# EAGLE board STorM32 BGC mpu module v008 (EAGLE 6.5.0)
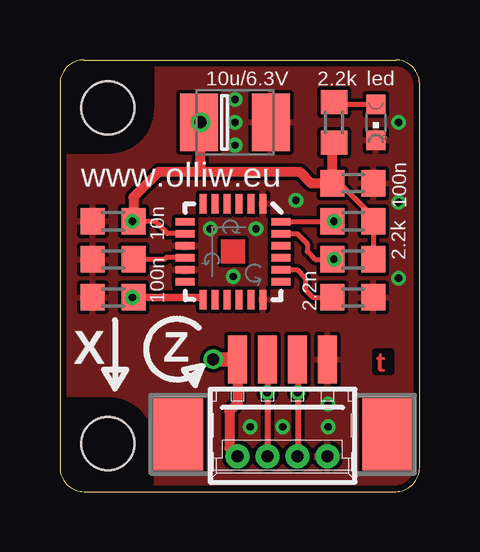
[diagram p0: board, top side]
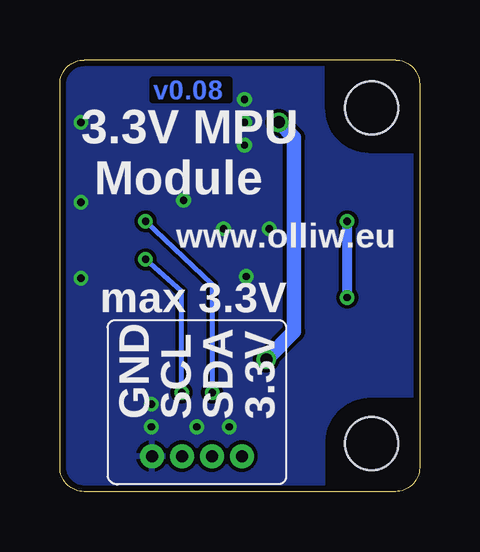
[diagram p1: board, bottom side, seen from below]

Size 15 x 18 mm. Coordinates in mm from the lower left corner, seen from the top.
Outline: 1,18 14,18 arc-90 15,17 15,1 arc-90 14,0 1,0 arc-90 0,1 0,17 arc-90 1,18
Copper layers (1*16): Top 0.035mm / dielectric 1.5mm / Bottom 0.035mm
Design rules "Fusion_eagle_rule_v1.1-shapes-supply-changed": minimum track width 6mil, minimum drill 12mil, track to track 6mil, track to pad 6mil, pad to pad 6mil, via to via 6mil, smd to smd 0mil, copper to edge 10mil, drill to drill 10mil, minimum pad ring 10mil, minimum via ring 6mil, stop-mask expansion 2mil, vias tented up to drill 100mil, thermal gap 6mil
Holes 2.2 mm at 2,2 2,16

## Footprints (pad centres in the part's own frame; a part is rotated, then mirrored left to right if it is on the bottom)
SMC_B = smd 1.6 x 2.4: + -1.5,0; - 1.5,0
C0603 = smd 1 x 1.1: 1 -0.85,0; 2 0.85,0
QFN-24 = smd 0.8 x 0.3: 1 -2,1.25; 2 -2,0.75; 3 -2,0.25; 4 -2,-0.25; 5 -2,-0.75; 6 -2,-1.25; 13 2,-1.25; 14 2,-0.75; 15 2,-0.25; 16 2,0.25; 17 2,0.75; 18 2,1.25 | smd 0.3 x 0.8: 7 -1.25,-2; 8 -0.75,-2; 9 -0.25,-2; 10 0.25,-2; 11 0.75,-2; 12 1.25,-2; 19 1.25,2; 20 0.75,2; 21 0.25,2; 22 -0.25,2; 23 -0.75,2; 24 -1.25,2
MOLEX-53261-04-SMD-BOTH = smd 0.8 x 2: 1 1.875,-2.5; 2 0.625,-2.5; 3 -0.625,-2.5; 4 -1.875,-2.5 | drill 0.5 pad 0.698: 5 1.875,1.545; 6 0.625,1.545; 7 -0.625,1.545; 8 -1.875,1.545 | smd 2.1 x 3: S1 4.375,0.625; S2 -4.375,0.625
CHIPLED_0603 = smd 0.8 x 0.8: A 0,-0.75; C 0,0.75
R0603 = smd 1 x 1.1: 1 -0.85,0; 2 0.85,0

## Placement (x,y rotation side)
C1  10u/6.3V  [SMC_B]  7.3,15.4 0 top
C2  100n  [C0603]  12.22,12.86 0 top
C3  100n  [C0603]  2.22,8.1 180 top
C4  10n  [C0603]  2.22,11.27 180 top
C5  2.2n  [C0603]  12.22,8.1 0 top
C6  100n  [C0603]  2.22,9.68 180 top
IC1  MPU6050  [QFN-24]  7.22,10 270 top
JP1  I2C#2  [MOLEX-53261-04-SMD-BOTH]  9.29,3.02 180 top
LED1  red  [CHIPLED_0603]  13.18,15.4 180 top
R1  2.2k  [R0603]  11.43,15.4 90 top
R2  2.2k  [R0603]  12.22,9.68 0 top
R3  2.2k  [R0603]  12.22,11.27 0 top

## Library data of the parts
C1-C6 R1-R3 = rcl
IC1 = # SparkFun2
JP1 = # stdlib
LED1 = led

## Nets
3.3V: C1.+ C2.1 C3.1 C4.1 IC1.8 IC1.13 JP1.1 JP1.5 R1.1 R2.2 R3.2
GND: C1.- C2.2 C3.2 C4.2 C5.2 C6.2 IC1.1 IC1.9 IC1.11 IC1.18 JP1.4 JP1.8 LED1.C
N$9: LED1.A R1.2
N$20: C6.1 IC1.10
N$24: C5.1 IC1.20
SCL: IC1.23 JP1.3 JP1.7 R2.1
SDA: IC1.24 JP1.2 JP1.6 R3.1

## Tracks (layer width: path | path; a pad name or v marks a point on that pad's centre or on a via)
3.3V  (via drill 0.3 pad 0.61, 0.5, 0.5 pad 0.61)
  Top 0.152: C2.1 11.75,12.78 | 13.02,11.51 R3.2 | 5.71,15.33 C1.+ v5.87,15.4 | v3.02,11.27 C4.1
  Top 0.203: R3.2 R2.2 | 11.75,12.78 13.02,11.51 | IC1.8 4.49,10.75 3.97,11.27 C4.1
  Top 0.305: IC1.13 5.97,8.04 5.95,8.1 C3.1
  Top 0.406: 5.71,15.33 v5.87,15.4 5.87,13.34 | v3.02,11.27 3.07,11.33 3.07,12.28 4.13,13.34 5.87,13.34 | C3.1 v3.02,8.1 | JP1.1 7.41,3.68 7.06,3.33 7.06,1.82 JP1.5 | 5.87,13.34 10,13.34 10.48,12.86 C2.1 11.37,14.49 R1.1
  Top 0.61: JP1.1 v6.39,5.52
  Bottom 0.406: v3.02,8.1 v3.02,11.27
  Bottom 0.61: v6.39,5.52 5.24,6.67 5.24,14.76 v5.87,15.4
GND  (via drill 0.3 pad 0.61)
  other vias: 7.94,2.7 9.29,2.7 7.3,16.35 7.3,14.45 7.3,15.4 14.13,12.06 14.13,8.89 8.18,10.95 6.27,10.95 7.22,8.97 11.19,2.7 11.19,3.65 14.13,15.4 9.84,12.14
  pour Bottom (isolate 0.152): 0.33,17 arc-90 1,17.67 14,17.67 arc-90 14.67,17 14.67,1 arc-90 14,0.33 1,0.33 arc-90 0.33,1
  pour Top (isolate 0.152): 0.33,17 arc-90 1,17.67 14,17.67 arc-90 14.67,17 14.67,1 arc-90 14,0.33 1,0.33 arc-90 0.33,1
  cutout Bottom: 0.27,14.12 2.12,14.12 arc90 3.92,16.02 3.92,17.77 1.02,17.77 arc90 0.27,17.02
  cutout Top: 0.27,14.12 2.12,14.12 arc90 3.92,16.02 3.92,17.77 1.02,17.77 arc90 0.27,17.02
  cutout Bottom: 3.9,0.25 3.9,2.1 arc90 2,3.9 0.25,3.9 0.25,1 arc90 1,0.25
  cutout Top: 3.9,0.25 3.9,2.1 arc90 2,3.9 0.25,3.9 0.25,1 arc90 1,0.25
N$9
  Top 0.152: R1.2 11.69,16.15
  Top 0.203: 11.69,16.15 LED1.A
N$20
  Top 0.203: IC1.10 4.43,9.75 4.37,9.68 C6.1
N$24
  Top 0.203: IC1.20 9.88,9.25 10.24,8.89 10.24,8.41 10.56,8.1 C5.1
SCL  (via drill 0.3 pad 0.61)
  Top 0.152: JP1.3 9.91,5.39 | v11.43,9.68 11.43,9.74 R2.1
  Top 0.203: IC1.23 9.89,10.75 10.32,10.32 10.32,10 10.64,9.68 R2.1 | 9.92,1.48 JP1.7
  Top 0.254: 9.91,5.39 v9.92,4.13 9.92,1.48
  Bottom 0.203: v9.92,4.13 9.92,8.33 v11.43,9.68
SDA  (via drill 0.3 pad 0.61)
  Top 0.152: 11.23,11.25 R3.1 11.43,11.33 v11.43,11.27 | JP1.2 8.66,5.55
  Top 0.203: IC1.24 11.23,11.25 | 8.65,1.48 JP1.6
  Top 0.254: 8.66,5.55 v8.65,4.13 8.65,1.48
  Bottom 0.203: v11.43,11.27 8.65,8.65 v8.65,4.13

## Text on the board
Top: t
Bottom: v0.08
tNames: led | www.olliw.eu | X | Z
bNames: 3.3V MPU / Module | www.olliw.eu | max 3.3V | 3.3V | SDA | SCL | GND